# Altium PCB My_L431_14.PcbDoc
Units mil, origin at the board's own origin, x right, y up, seen from the top; angles counter-clockwise.
Board outline 3350 x 3850 mil, 2 copper layers (Top Layer, Bottom Layer); 27 components, 75 nets, 254 pads, 95 vias.
Unrouted connection lines stored in the file: 2.
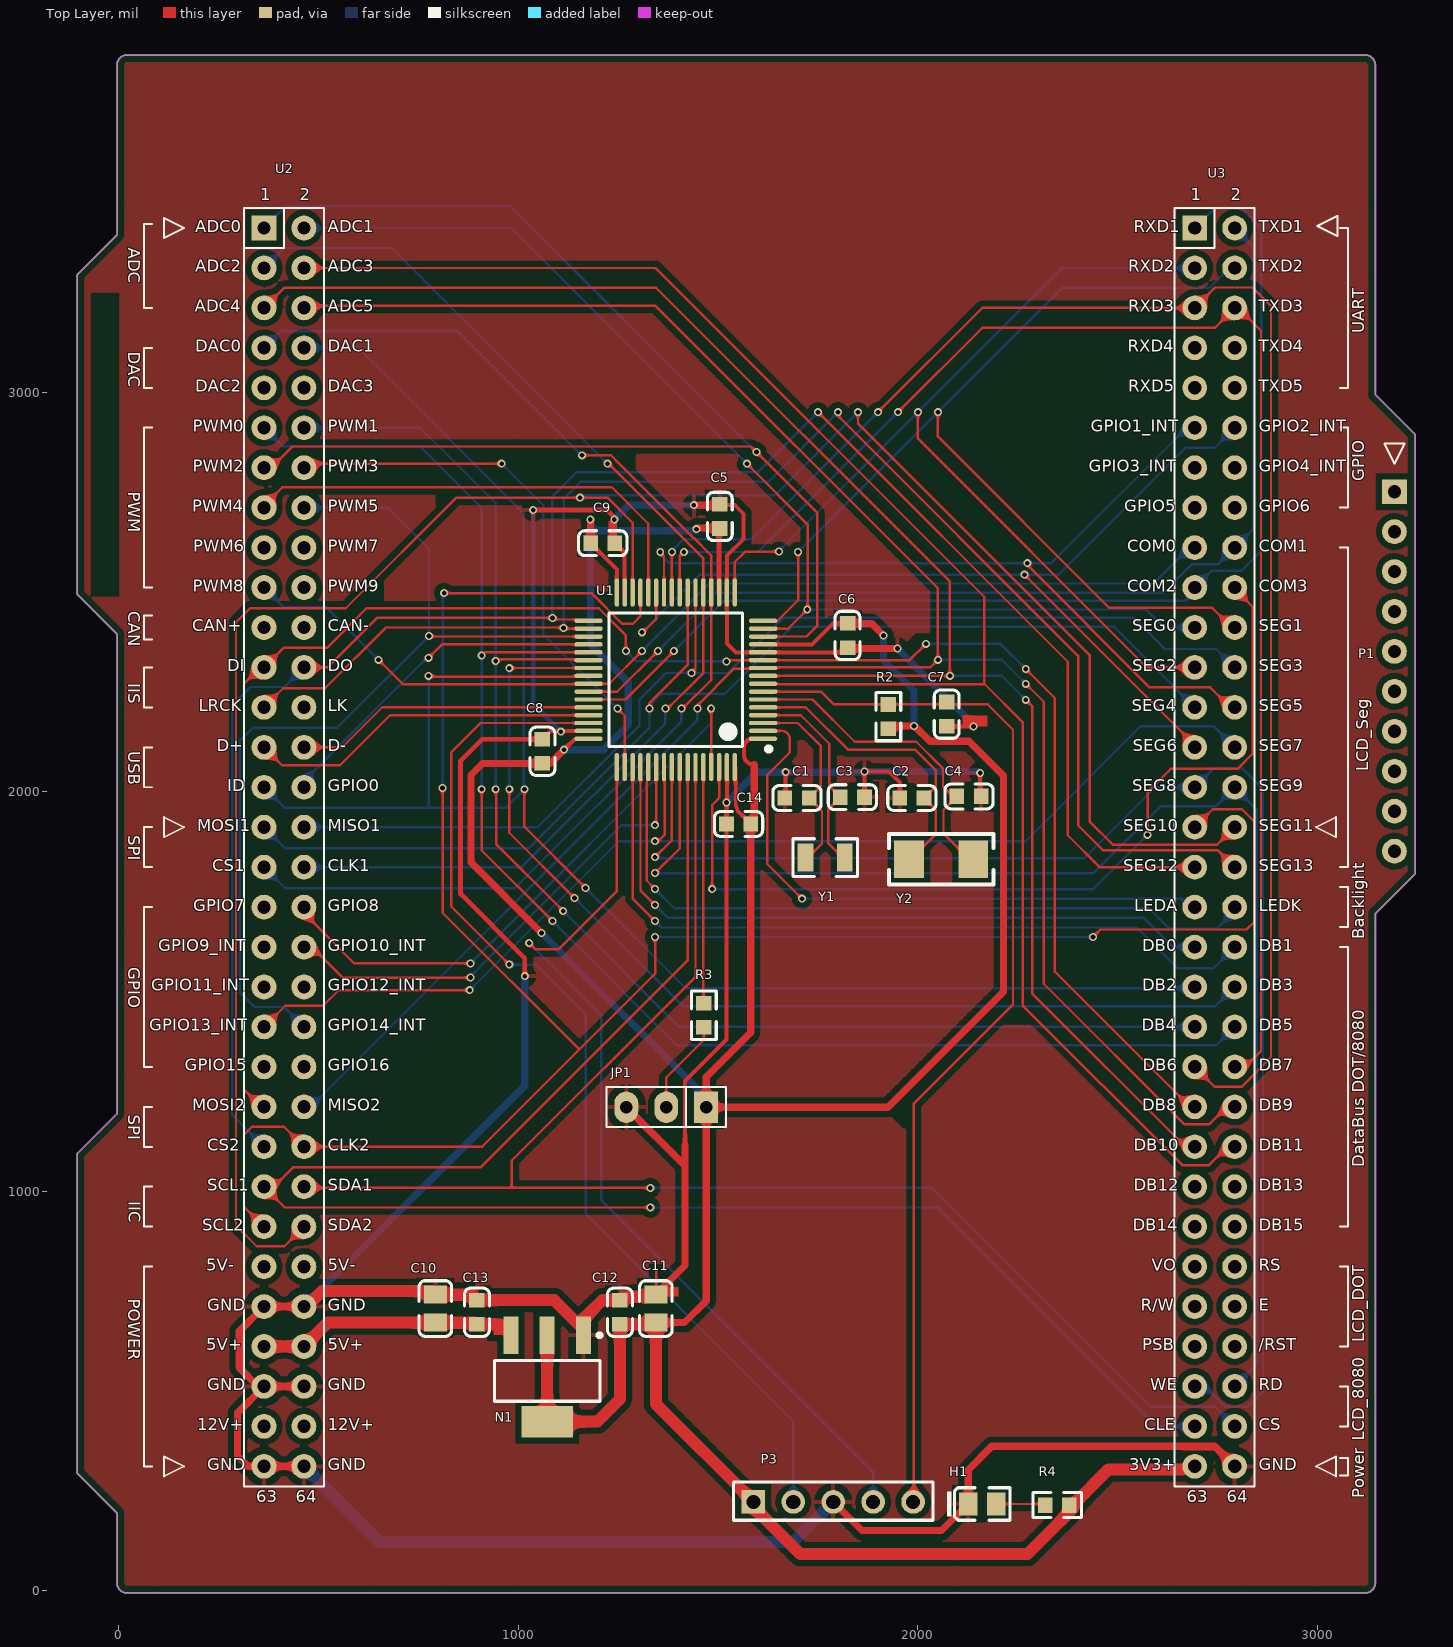
[diagram p0: Top Layer view]
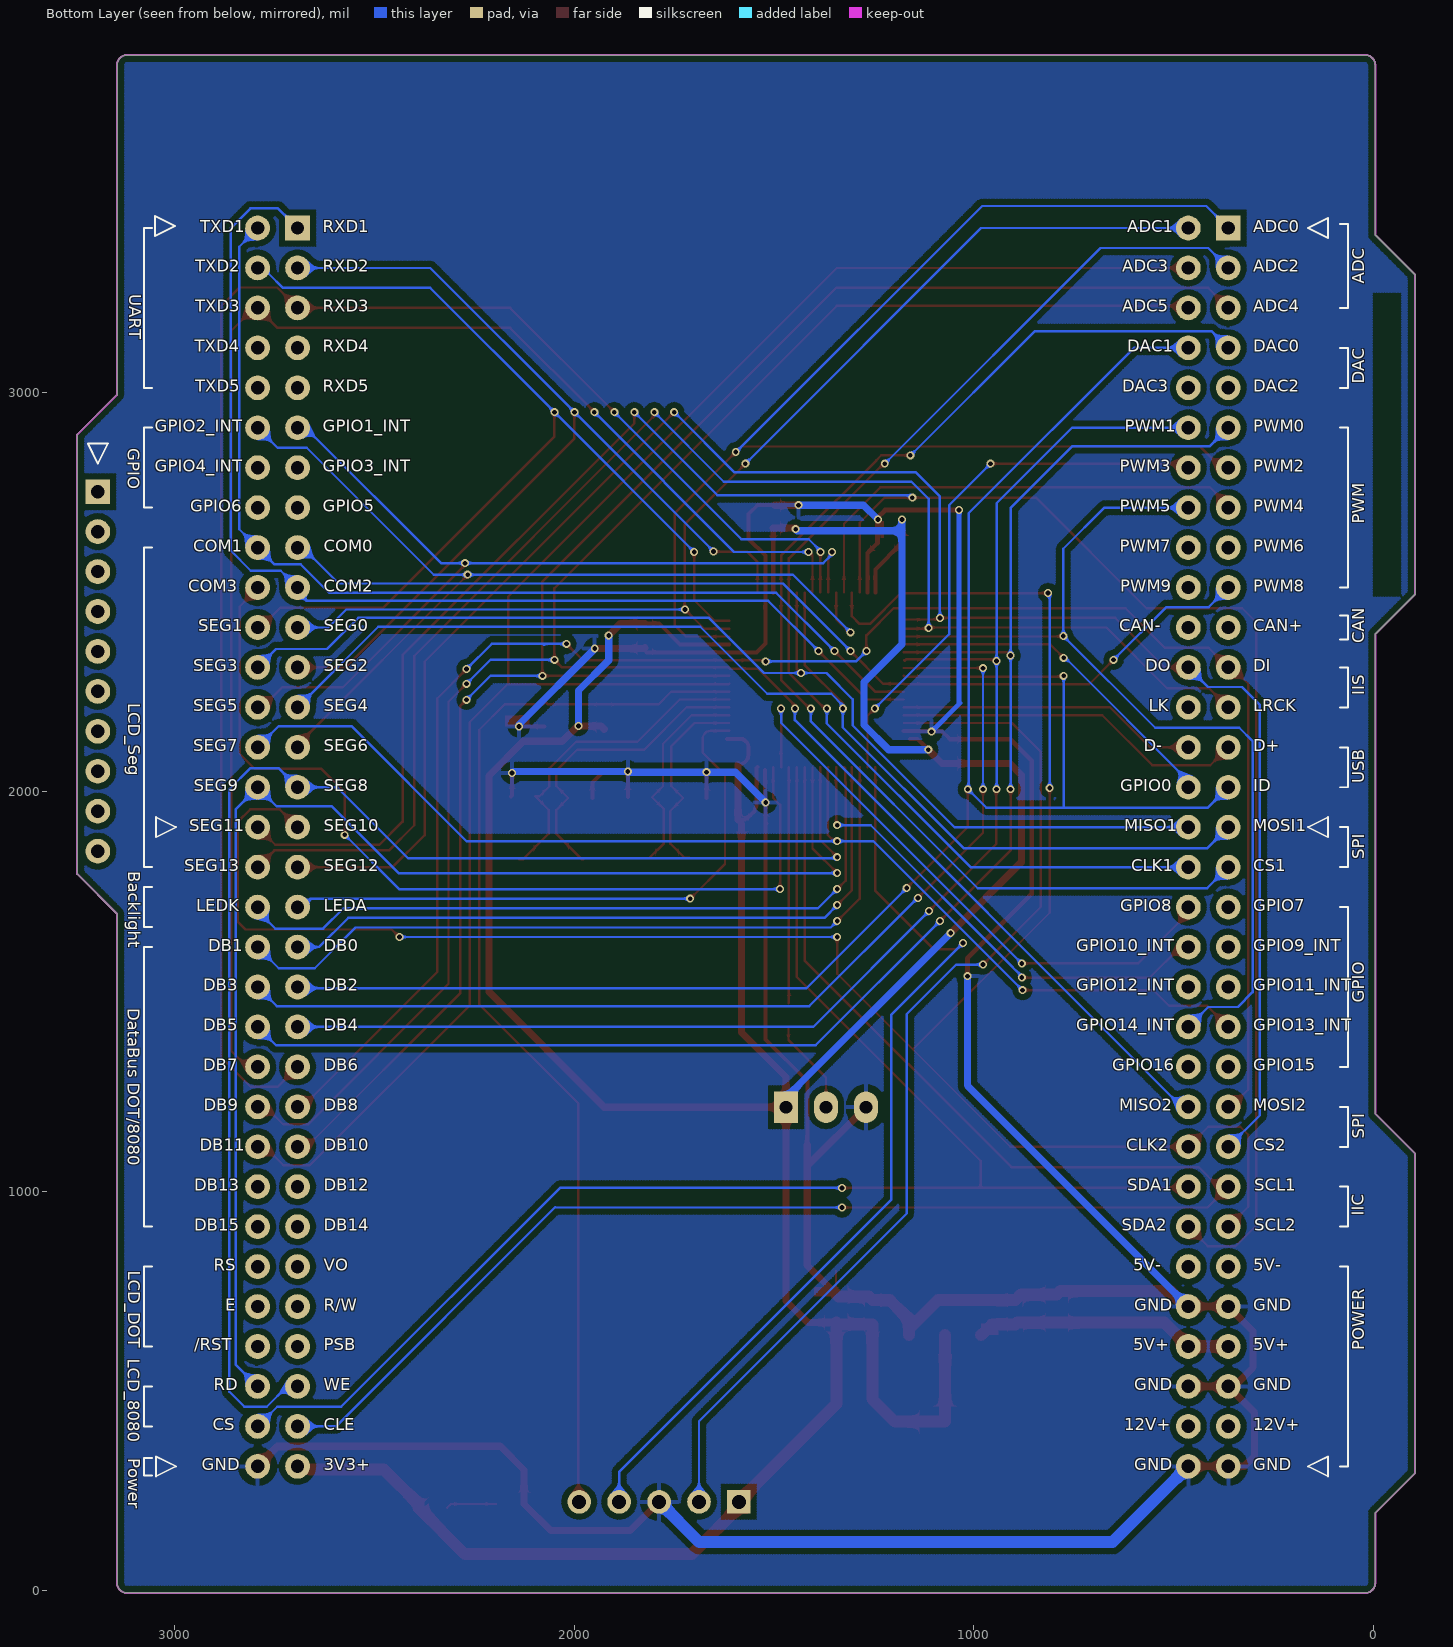
[diagram p1: Bottom Layer view, seen from below]
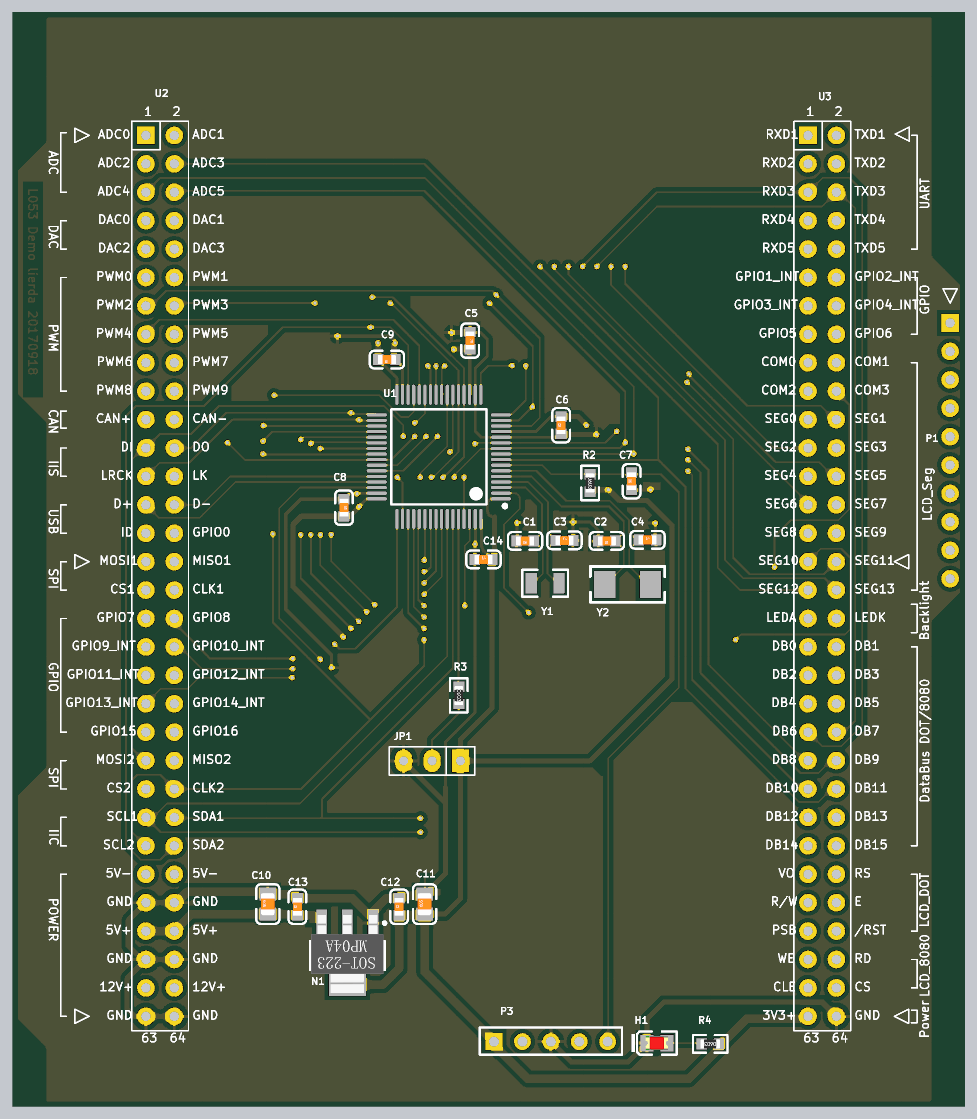
[diagram p2: 3D render of the assembled board from above, using the file's embedded part models]

## Layer stack, top to bottom
Top Solder: solder mask 0.4, Solder Resist, Dk 3.5
Top Layer: signal copper 1.4
Dielectric 1: dielectric 12.6, FR-4, Dk 4.8
Bottom Layer: signal copper 1.4
Bottom Solder: solder mask 0.4, Solder Resist, Dk 3.5

## Board outline
-5,19 -5,194 -105,294 -105,1094 -5,1194 -5,2394 -105,2494 -105,3294 -5,3394 -5,3819 cw(c20,3819) 20,3844 3120,3844 cw(c3120,3819) 3145,3819 3145,2994 3245,2894 3245,1794 3145,1694 3145,19 cw(c3120,19) 3120,-6 20,-6 cw(c20,19)

## Design rules (kind name [scope] priority, off if disabled: settings)
Clearance [All] p1: gap=15
PolygonConnect [All] p1: connectstyle=Relief reliefconductorwidth=10 reliefentries=4 polygonreliefangle="90 Angle" airgapwidth=18
RoutingTopology [All] p1: topology=Starburst
RoutingVias [All] p1: holewidth=12 width=20 viastyle="Through Hole" minholewidth=12 minwidth=20 maxholewidth=12 maxwidth=20
SilkToSilkClearance [All] p1: silktosilkclearance=2
SolderMaskExpansion [All] p1: expansion=2.5
Width POWER [InNetClass('Power')] p1: maxlimit=60 minlimit=8 preferedwidth=18
Width [All] p2: maxlimit=6 minlimit=6 preferedwidth=6
28 further rules are at their usual default settings.

## Classes and differential pairs
component class L431_BNRG: C1 C2 C3 C4 C5 C6 C7 C10 C11 C12 C13 C14 H1 JP1 N1 P1 P3 R2 R3 R4 U3 Y1 Y2
net class Power: GND VCC-3.3V VCC_5V+ VCC_5V- VCC_12V
net class GPIO: GPIO_PB0 GPIO_PB1 GPIO_PB2 GPIO_PB3 GPIO_PB8 GPIO_PB14 GPIO_PB15 GPIO_PD2

## Components (designator, comment, footprint, x,y, rotation, side; value= is the part's Value field where it differs from the comment)
C1 "12pF (120) 5% 50V" 0603_C 1697.31,1984 r180 top
C2 "20pF (200) 5% 50V" 0603_C 1985,1984 r180 top
C3 "12pF (120) 5% 50V" 0603_C 1836,1986 r0 top
C4 "20pF (200) 5% 50V" 0603_C 2128,1988 r0 top
C5 "100nF (104) 10% 50V" 0603_C 1504,2689 r270 top
C6 "100nF (104) 10% 50V" 0603_C 1824,2391 r90 top
C7 "100nF (104) 10% 50V" 0603_C 2072,2194 r90 top
C8 "100nF (104) 10% 50V" 0603_C 1060,2101 r270 top
C9 "100nF (104) 10% 50V" 0603_C 1211,2622 r180 top
C10 "100uF" 0805_C 792,706 r90 top
C11 "100uF" 0805_C 1344,706 r90 top
C12 "100nF" 0603_C 1254,696.75 r90 top
C13 "100nF" 0603_C 896,696.75 r90 top
C14 "100nF (104) 10% 50V" 0603_C 1551,1919 r0 top
H1 "发光二极管" 0805_LED_S1 2161,216.75 r0 top
JP1 "JX3" SIP3 1470,1210 r180 top
N1 "AMS1117-3.3V" SOT-223 1072,525 r270 top
P1 "DIP10-2.54" DIP10-2.54 3193,2751 r0 top
P3 "SWD" HDR1X5 1588,222 r0 top
R2 "10K" 0603_R 1926,2188 r270 top
R3 "10K" 0603_R 1464,1440.32 r270 top
R4 "1K" 0603_R 2349,214 r180 top
U1 "STM32L053R8T6" LQFP-64_10x10x05P 1394,2280 r90 top
U2 "DIP32x2-2.54-L" DIP32x2-2.54-L 363,3411 r0 top
U3 "DIP32x2-2.54-R" DIP32x2-2.54-R 2693,3411 r0 top
Y1 "32.768KHz ±20ppm 12.5pF" "SMD-3215_2P FC - 135" 1768,1835 r180 top
Y2 "8MHz ±20ppm 20pF" SMD-5032_2P 2058,1831 r180 top

## Footprints (in the part's own frame and the unit in brackets; to place one, negate y for a bottom-side part, rotate by r counter-clockwise, add the part's x,y. Pads: shape width x height; smd on the part's side, far side on the other; paste and mask are expansions set on the pad)
0603_C [mm]
  rect 0.93x0.98 smd: 1(-0.77,0) 2(0.77,0)
  silkscreen extent -1.53,-0.79 1.54,0.79, body extent -0.8,-0.4 0.8,0.4, height 0.3
0603_R [mm]
  rect 0.93x0.98 smd: 1(-0.77,0) 2(0.77,0)
  silkscreen extent -1.53,-0.79 1.54,0.79, body extent -0.85,-0.4 0.85,0.4, height 0.56
0805_C [mm]
  rect 1.16x1.47 smd: 1(-0.89,0) 2(0.89,0)
  silkscreen extent -1.77,-1.04 1.77,1.04, body extent -1,-0.62 1,0.63, height 0.77
0805_LED_S1 [mm]
  rect 1.16x1.47 smd: A(0.89,0) K(-0.89,0)
  silkscreen extent -2.24,-1.04 1.77,1.03, body extent -1.01,-0.62 1.01,0.62, height 1.1
DIP10-2.54 [mm] "双排直插针，2.54间距，加长针"
  rect 1.575x1.575 hole 0.85: 1(0,0)
  round 1.575 hole 0.85: 2(0,-2.54) 3(0,-5.08) 4(0,-7.62) 5(0,-10.16) 6(0,-12.7) 7(0,-15.24) 8(0,-17.78) 9(0,-20.32) 10(0,-22.86)
  silkscreen extent -0.64,1.78 0.64,3.05
DIP32x2-2.54-L [mm] "双排直插针，2.54间距，加长针"
  rect 1.575x1.575 hole 0.85: 1(0,0)
  round 1.575 hole 0.85: 2(2.54,0) 3(0,-2.54) 4(2.54,-2.54) 5(0,-5.08) 6(2.54,-5.08) 7(0,-7.62) 8(2.54,-7.62) 9(0,-10.16) 10(2.54,-10.16) 11(0,-12.7) 12(2.54,-12.7) 13(0,-15.24) 14(2.54,-15.24) 15(0,-17.78) 16(2.54,-17.78) 17(0,-20.32) 18(2.54,-20.32) 19(0,-22.86) 20(2.54,-22.86) 21(0,-25.4) 22(2.54,-25.4) 23(0,-27.94) 24(2.54,-27.94) 25(0,-30.48) 26(2.54,-30.48) 27(0,-33.02) 28(2.54,-33.02) 29(0,-35.56) 30(2.54,-35.56) 31(0,-38.1) 32(2.54,-38.1) 33(0,-40.64) 34(2.54,-40.64) 35(0,-43.18) 36(2.54,-43.18) 37(0,-45.72) 38(2.54,-45.72) 39(0,-48.26) 40(2.54,-48.26) 41(0,-50.8) 42(2.54,-50.8) 43(0,-53.34) 44(2.54,-53.34) 45(0,-55.88) 46(2.54,-55.88) 47(0,-58.42) 48(2.54,-58.42) 49(0,-60.96) 50(2.54,-60.96) 51(0,-63.5) 52(2.54,-63.5) 53(0,-66.04) 54(2.54,-66.04) 55(0,-68.58) 56(2.54,-68.58) 57(0,-71.12) 58(2.54,-71.12) 59(0,-73.66) 60(2.54,-73.66) 61(0,-76.2) 62(2.54,-76.2) 63(0,-78.74) 64(2.54,-78.74)
  silkscreen extent -7.62,-80.01 3.81,1.27
DIP32x2-2.54-R [mm] "双排直插针，2.54间距，加长针"
  rect 1.575x1.575 hole 0.85: 1(0,0)
  round 1.575 hole 0.85: 2(2.54,0) 3(0,-2.54) 4(2.54,-2.54) 5(0,-5.08) 6(2.54,-5.08) 7(0,-7.62) 8(2.54,-7.62) 9(0,-10.16) 10(2.54,-10.16) 11(0,-12.7) 12(2.54,-12.7) 13(0,-15.24) 14(2.54,-15.24) 15(0,-17.78) 16(2.54,-17.78) 17(0,-20.32) 18(2.54,-20.32) 19(0,-22.86) 20(2.54,-22.86) 21(0,-25.4) 22(2.54,-25.4) 23(0,-27.94) 24(2.54,-27.94) 25(0,-30.48) 26(2.54,-30.48) 27(0,-33.02) 28(2.54,-33.02) 29(0,-35.56) 30(2.54,-35.56) 31(0,-38.1) 32(2.54,-38.1) 33(0,-40.64) 34(2.54,-40.64) 35(0,-43.18) 36(2.54,-43.18) 37(0,-45.72) 38(2.54,-45.72) 39(0,-48.26) 40(2.54,-48.26) 41(0,-50.8) 42(2.54,-50.8) 43(0,-53.34) 44(2.54,-53.34) 45(0,-55.88) 46(2.54,-55.88) 47(0,-58.42) 48(2.54,-58.42) 49(0,-60.96) 50(2.54,-60.96) 51(0,-63.5) 52(2.54,-63.5) 53(0,-66.04) 54(2.54,-66.04) 55(0,-68.58) 56(2.54,-68.58) 57(0,-71.12) 58(2.54,-71.12) 59(0,-73.66) 60(2.54,-73.66) 61(0,-76.2) 62(2.54,-76.2) 63(0,-78.74) 64(2.54,-78.74)
  silkscreen extent -1.27,-80.01 9.75,1.27
HDR1X5 [mm]
  rect 1.5x1.5 hole 0.9: 1(0,0)
  round 1.5 hole 0.9: 2(2.54,0) 3(5.08,0) 4(7.62,0) 5(10.16,0)
  silkscreen extent -1.27,-1.17 11.43,1.27
LQFP-64_10x10x05P [mm]
  oval 0.28x1.8 smd mask+0.051: 1(-3.75,-5.55) 2(-3.25,-5.55) 3(-2.75,-5.55) 4(-2.25,-5.55) 5(-1.75,-5.55) 6(-1.25,-5.55) 7(-0.75,-5.55) 8(-0.25,-5.55) 9(0.25,-5.55) 10(0.75,-5.55) 11(1.25,-5.55) 12(1.75,-5.55) 13(2.25,-5.55) 14(2.75,-5.55) 15(3.25,-5.55) 16(3.75,-5.55) 33(3.75,5.55) 34(3.25,5.55) 35(2.75,5.55) 36(2.25,5.55) 37(1.75,5.55) 38(1.25,5.55) 39(0.75,5.55) 40(0.25,5.55) 41(-0.25,5.55) 42(-0.75,5.55) 43(-1.25,5.55) 44(-1.75,5.55) 45(-2.25,5.55) 46(-2.75,5.55) 47(-3.25,5.55) 48(-3.75,5.55)
  oval 1.8x0.28 smd mask+0.051: 17(5.55,-3.75) 18(5.55,-3.25) 19(5.55,-2.75) 20(5.55,-2.25) 21(5.55,-1.75) 22(5.55,-1.25) 23(5.55,-0.75) 24(5.55,-0.25) 25(5.55,0.25) 26(5.55,0.75) 27(5.55,1.25) 28(5.55,1.75) 29(5.55,2.25) 30(5.55,2.75) 31(5.55,3.25) 32(5.55,3.75) 49(-5.55,3.75) 50(-5.55,3.25) 51(-5.55,2.75) 52(-5.55,2.25) 53(-5.55,1.75) 54(-5.55,1.25) 55(-5.55,0.75) 56(-5.55,0.25) 57(-5.55,-0.25) 58(-5.55,-0.75) 59(-5.55,-1.25) 60(-5.55,-1.75) 61(-5.55,-2.25) 62(-5.55,-2.75) 63(-5.55,-3.25) 64(-5.55,-3.75)
  silkscreen extent -4.55,-6.05 4.25,4.25
SIP3 [mil]
  rect 60x78.74 hole 32: 1(0,0)
  oval 60x78.74 hole 32: 2(100,0) 3(200,0)
  silkscreen extent -50,-50 250,50
"SMD-3215_2P FC - 135" [mm]
  rect 1x1.8 smd: 1(-1.25,0) 2(1.25,0)
  silkscreen extent -2.05,-1.2 2.05,1.2
SMD-5032_2P [mm]
  rect 1.9x2.4 smd: 1(-2.05,0) 2(2.05,0)
  silkscreen extent -3.32,-1.6 3.32,1.6
SOT-223 [mm] "SOT223, 4-Leads, Body 6.7x7.3mm (max), Pitch 2.30mm, IPC Medium Density"
  rect 2.4x0.95 smd: 1(-2.9,2.3) 2(-2.9,0) 3(-2.9,-2.3)
  rect 2x3.3 smd: 2(2.6,0)
  silkscreen extent -3.02,-3.35 1.3,3.45, body extent -3.63,-3.25 3.33,3.25, height 1.7

## Part data
C1 C3: library part "0603 12pF (1", "贴片电容"
C2 C4: library part "0603 20pF (2", "贴片电容"
C5 C6 C7 C8 C9 C14: library part "0603 100nF (104)", "贴片电容"
C10 C11: library part 极性电容器
C12 C13: library part 普通贴片电容, "Capacitor"
JP1: "Connector"
P3: library part "Header 5", "Header, 5-Pin"
R2 R3 R4: library part 普通贴片电阻
U1: library part STM32F103RET6, "ARM"
Y1: library part SM, "贴片晶振"
Y2: library part "SMD-5032_2P 8MHz 20ppm 2", "贴片晶振"

## Via types
v1: diameter 20, hole 12, Top Layer to Bottom Layer, 95 vias

## Nets (pads, with @x,y where several pads share a name; then routed paths per layer and width w, separated by ;. In a path a pad name is that pad's centre, name@x,y a point inside that pad or via, vN(x,y) a via of type N, cw(c..) or ccw(c..) an arc to the next point about the centre after c; other vN are vias at no path point)
ADC0: U1.14 U2.1 U2.13 | length 3416.3
  Top Layer w6: U2.13 381,2811 434,2864 1582,2864 v1(1596,2850) 1748.46,2697.54 1748.46,2416 1720.73,2388.27 U1.14
  Bottom Layer w6: U2.1 418,3466 979,3466 1595,2850 v1(1596,2850)
ADC1: U1.15 U2.2 U3.21 | length 2900.8
  Top Layer w6: v1(1572,2821) 1724,2669 1724,2457 v1(1723,2456) 1674.95,2407.95 U1.15
  Bottom Layer w6: U2.2 982,3411 v1(1572,2821) ; v1(1723,2456) 2571,2456 2616,2411 U3.21
ADC2: U1.21 U2.3 U2.34 | length 2951.3
  Top Layer w6: v1@1224.35,2822.35 1462.9,2583.8 U1.21 1462.9,2297.2 1373.7,2208 v1(1368,2208)
  Bottom Layer w6: U2.3 413,3361 683,3361 v1(1223,2821) ; U2.34 1008,1811 1368,2171 v1(1368,2208)
ADC3: U1.8 U2.4 U3.48 | length 4377
  Top Layer w6: U2.4 1343,3311 2166,2488 2166,2270.16 ; U1.8 1613.82,2268.84 2164.69,2268.84 2166,2270.16 ; U3.48 2775,1111 2729,1065 2662,1065 2262,1465 2262,2174.16 2166,2270.16
ADC4: U1.9 U2.5 U3.47 | length 4268.3
  Top Layer w6: U2.5 413,3261 1345,3261 2080,2526 v1(2080,2290) 1612.66,2290 U1.9 ; v1(2270,2230) 2286,2214 2286,1495 2670,1111 U3.47
  Bottom Layer w6: v1(2080,2290) 2210,2290 v1(2270,2230)
ADC5: U1.10 U2.6 U2.46 U3.46 | length 5781.6
  Top Layer w6: U2.6 468,3216 1343,3216 2050,2509 v1(2050,2330) 2031,2311 1613.98,2311 U1.10 1610.98,2308 1540,2308 v1@1448,2216 ; v1(2270,2270) 2315,2225 2315,1519 2667,1167 2729,1167 2773,1211 U3.46
  Bottom Layer w6: U2.46 480,1211 1448,2179 v1(1448,2208) ; v1(2050,2330) 2210,2330 v1(2270,2270)
BOOT0: R3.1 U1.60 | length 591.3
  Top Layer w6: U1.60 1462.9,1471.73 R3.1
DAC1: U1.20 U2.7 U2.33 | length 3058
  Top Layer w6: v1(1159,2842) 1231.7,2842 1244,2829.7 1244,2829.3 1437.3,2636 1438,2636 1482.58,2591.42 U1.20 1482.58,2279.58 1411,2208 v1(1408,2208)
  Bottom Layer w6: U2.33 416,1758 990,1758 1408,2176 v1(1408,2208) ; U2.7 405,3153 847,3153 1158,2842 v1(1159,2842)
DAC2: U1.40 U2.8 U2.29 U3.39 | length 4799.2
  Top Layer w6: v1(775,2290) 777,2288 1173.65,2288 U1.40 ; v1(1015,2006) 1015,1912 v1(1168,1759)
  Bottom Layer w6: U2.29@386,2011 U2.29 414,1960 969,1960 v1(1015,2006) 1013,2008 1013,2697 599,3111 U2.8 ; 775,1962 v1(775,2290) ; v1(1168,1759) 1419,1508 2690,1508 U3.39
DB0: U1.52 U3.37 | length 1755.1
  Top Layer w6: U1.52 1305.42,1752.58 v1(1342,1716)
  Bottom Layer w6: v1(1342,1716) 1374,1684 2566,1684 2639,1611 U3.37
DB1: U1.51 U3.38 | length 1930.6
  Top Layer w6: U1.51 1285.73,1732.27 v1(1342,1676)
  Bottom Layer w6: v1(1342,1676) 1358,1660 2548,1660 2650,1558 2740,1558 U3.38
DB3: U1.39 U3.40 | length 2625.8
  Top Layer w6: v1(977,2006) 977,1897 v1(1140,1734) ; v1@978,2311 979.47,2309.53 U1.39
  Bottom Layer w6: v1(977,2006) v1(977,2309) ; v1(1140,1734) 1141,1734 1412,1463 2745,1463 U3.40
DB4: U1.38 U2.12 U3.41 | length 3590.7
  Top Layer w6: v1@943,2326 v1@946.21,2329.21 ; v1(943,2327) 947,2331 1169.28,2331 1173.28,2327 U1.38@1174.5,2329.21 ; v1@944,2006 944,1869 v1(1112,1701)
  Bottom Layer w6: U2.12 754,2911 943,2722 v1(943,2327) v1(943,2006) ; v1(1112,1701) 1402,1411 U3.41
DB5: U1.37 U2.11 U3.42 | length 3867.2
  Top Layer w6: v1@908,2011 v1(908,2006) 908,1853 v1(1085,1676) ; v1(908,2341) 915.9,2348.9 U1.37
  Bottom Layer w6: U2.11 409,2865 753,2865 908,2710 v1(908,2341) v1(908,2006) ; v1(1085,1676) 1396,1365 2747,1365 U3.42
DB6: U1.25 U3.5 U3.43 | length 4019.6
  Top Layer w6: U1.25 v1(1384.16,2600) v1@1384.16,2601.16 ; v1(1900,2950) 2161,3211 U3.5 2744,3262 2838,3262 2884,3216 2884,1335 2810,1261 2743,1261 U3.43
  Bottom Layer w6: v1@1384.16,2601.16 1384.16,2602.86 1413.3,2632 1582,2632 v1(1900,2950)
DB7: U1.24 U3.6 U3.44 | length 3717.5
  Top Layer w6: U1.24@1407.02,2501.68 U1.24 1403.84,2570.41 1403.84,2589.84 v1(1414,2600) ; v1(1950,2950) 2161,3161 2743,3161 U3.6 2802,3211 2859,3154 2859,1351 2819,1311 U3.44
  Bottom Layer w6: v1(1414,2600) 1600,2600 v1(1950,2950)
DB8: U1.11 U2.23 U2.45 U3.45 | length 4532
  Top Layer w6: U2.45 356,1211 313,1254 313,2270 354,2311 U2.23 412,2360 521,2360 620,2459 1201.2,2459 1269,2391.2 v1(1269,2352) ; v1(1521,2326) 1521,2320.79 1521.79,2320 1531,2329.21 U1.11 1979.21,2329.21 v1(2020,2370) ; v1(2270,2307) 2343,2234 2343,1549 2681,1211 U3.45
  Bottom Layer w6: v1(1269,2352) 1295,2326 v1(1521,2326) ; v1(2020,2370) 2074,2370 ; 2077,2367 2074,2370 ; v1(2270,2307) 2207,2370 2074,2370
DB12: U3.49
DB13: U3.50
DB14: U3.51
DB15: U3.52
DISPLAY0: P1.1
DISPLAY1: P1.2
DISPLAY2: P1.3
GND: C1.2 C2.2 C3.2 C4.2 C5.1 C6.1 C7.1 C8.1 C9.1 C10.2 C11.2 C12.2 C13.2 C14.1 H1.K JP1.3 N1.1 P3.3 U1.12 U1.18 U1.31 U1.47 U1.63 U2.55 U2.56 U2.59 U2.60 U2.63 U2.64 U3.64 | length 11542
  Top Layer w10: C8.1 1080.42,2151.73 1119.05,2151.73 ; 1119.05,2152.05 U1.47 ; C9.1 1266.05,2597.27 U1.31 ; C12.2 C12.2@1262.47,735.53 ; 1417,1115 1417,1276 1521,1380 C14.1@1521,1922.68 ; C5.1@1498.68,2717 1542,2717 1564,2695 1564,2633 1521.95,2590.95 U1.18 1521.95,2371.05 1544.1,2348.9 U1.12 C6.1@1819.79,2348.9 ; C14.1@1520,1918.32 C14.1 1519,1920.68 C14.1@1521,1922.68 ; v1(1521,1973) C14.1@1521,1922.68 ; v1@1522.27,1976.97 U1.63@1522.27,2054.5 ; C1.2@1669,1984 v1(1669,2048.68) ; C3.2 v1(1866.31,2050.68) 1927.31,2050.68 1954.69,2023.32 C2.2 ; C7.1@2074.27,2163.42 v1(2138.95,2163.42) ; v1(2156,2047) 2156,1990.32 C4.2
  Top Layer w12: v1(1016,1538) 1016,1583 855,1744 855,2077 909.32,2131.32 C8.1 ; v1@1034,2705 v1(1037,2705) 1222,2705 1241.32,2685.68 C9.1
  Top Layer w18: U2.64 U2.63 323,311 297,337 297,445 U2.59 ; U2.60 U2.59 ; U2.56 U2.55 301,649 301,558 348,511 U2.59 ; JP1.3 1415.5,1064.5 ; C11.2 1417,814.04 1417,1115 ; v1(1439,2717) C5.1@1498.68,2717 ; P3.3 1860,150 2059.21,150 H1.K 2125.96,301.96 2185,361 2666.63,361 ; C6.1@1824,2360 1826,2358 v1(1949,2358)
  Top Layer w20: 2666.63,361 2743,361 U3.64
  Top Layer w30: U2.56 470,711 509,750 783.04,750 C10.2 882.02,741.04 C13.2 1089.94,727.06 N1.1@1162.55,654.45 ; N1.1 N1.1@1162.55,654.45 ; C12.2 1210.06,727.06 1162.55,679.55 N1.1@1162.55,654.45 ; C12.2@1262.47,735.53 1338.49,735.53 C11.2
  Bottom Layer w12: 1034,2222 v1(1106,2150) ; 1037,2222 v1(1037,2705)
  Bottom Layer w18: U2.56 1016,1264 v1(1016,1538) ; v1(1240,2681) 1276,2717 v1(1439,2717) ; v1(1521,1973) 1596.69,2048.68 v1(1669,2048.68) 1864.31,2048.68 v1(1866.31,2050.68) 2152.31,2050.68 v1(2156,2047) ; v1(1949,2358) 2138.95,2168.05 v1(2138.95,2163.42)
  Bottom Layer w30: U2.64 653,121 1687,121 P3.3
GPIO_PB0: U1.26 U3.11 U3.26 | length 2279.9
  Top Layer w6: v1@1352.5,2599.5 1364.47,2587.53 U1.26 ; v1@2267,2572 v1(2274,2572) 2274,2567 2580,2261 2732,2261 2782,2211 U3.26
  Bottom Layer w6: v1@1355,2602 v1(1355,2600) 1355,2594 1377,2572 v1(2274,2572) 2334,2572 2673,2911 U3.11
GPIO_PB1: U1.27 U3.12 U3.27 | length 2417.6
  Top Layer w6: v1@1312,2399 1344.79,2431.79 U1.27 ; v1(2267,2543) 2693,2117 U3.27
  Bottom Layer w6: v1(1309,2399) 1453,2543 v1(2267,2543) 2352,2543 2670,2861 2743,2861 U3.12
GPIO_PB2: U1.28 U2.15 | length 1196.2
  Top Layer w6: U2.15 363,2716 409,2762 1233.8,2762 1325.1,2670.7 U1.28
GPIO_PB3: U1.55 U2.41 U3.28 | length 2964.4
  Top Layer w6: U2.41 416,1464 511,1464 550,1503 v1(878,1503) ; v1(1342,1876) 1350,1876 1365.79,1891.79 1365.79,2060.18 U1.55
  Bottom Layer w6: v1(878,1503) 878.2,1503 1251.2,1876 v1(1342,1876) 2270,1876 2558,2164 2740,2164 U3.28
GPIO_PB8: U1.61 U2.36 | length 1531.7
  Top Layer w6: U2.36 463,1696 589,1570 v1(880,1570) ; U1.61 v1(1482.58,2208) v1@1482.58,2216
  Bottom Layer w6: v1(880,1570) 1482.58,2172.58 v1(1482.58,2208) ; v1@1480,2208 v1@1480,2213.42
GPIO_PB14: U1.35 U2.16 U2.42 | length 2375.6
  Top Layer w6: v1@783,2390 784.73,2388.27 U1.35
  Bottom Layer w6: U2.42 413,1461 339,1461 302,1498 302,2126.57 335.43,2160 546,2160 v1(776,2390) 776,2608 673,2711 U2.16
GPIO_PB15: U1.36 U2.30 | length 870
  Top Layer w6: v1(775,2335) 808.58,2368.58 U1.36
  Bottom Layer w6: U2.30 463,2027 771,2335 v1(775,2335)
GPIO_PD2: U1.54 U2.38 | length 1219.2
  Top Layer w6: U2.38 483,1611 559.5,1534.5 v1(880,1534.5) ; v1(1342,1916) 1344.79,1918.79 U1.54
  Bottom Layer w6: v1@876.5,1534.5 889,1547 889.53,1547 903,1560.47 903,1561 1258,1916 v1(1342,1916)
I2C1_SCL: U1.58 U2.49 U3.61 | length 4358.5
  Top Layer w6: v1(1330,959) 415,959 U2.49 388,1011 437,1060 906,1060 1423.53,1577.53 U1.58
  Bottom Layer w6: v1(1330,959) 2047,959 2048,960 2597,411 U3.61
I2C1_SDA: U1.59 U2.50 U3.62 | length 3817.7
  Top Layer w6: U2.50 466,1008 983,1008 ; v1(1330,1008) 983,1008 ; U1.59 1443.21,1536.21 983,1076 983,1008
  Bottom Layer w6: v1@1335,1008 2036,1008 2584,460 2744,460 U3.62
I2C2_SCL: U1.29 U2.48 U2.51 U3.31 | length 5402.3
  Top Layer w6: U2.51 313,961 313,1141 333,1161 413,1161 U2.48 909,1111 1342,1544 v1(1342,1636) ; v1(810,2009) 810,1697 1151.5,1355.5 ; v1(814,2497) 1183,2497 1260,2420 1286,2420 1305.42,2439.42 U1.29 ; v1(2438,1636) 2457,1655 2823,1655 2842,1674 2842,1925 2811,1956 2738,1956 U3.31
  Bottom Layer w6: v1(810,2009) 810,2493 v1(814,2497) ; v1(1342,1636) v1(2438,1636)
I2C2_SDA: U1.30 U2.52 U3.32 | length 5502.7
  Top Layer w6: U2.52 414,862 345,862 293,914 293,2424 328,2459 567.57,2459 844.57,2736 v1(1154,2736) 1223,2736 1285.73,2673.27 U1.30 ; v1(1850,2950) 1850,2922 2430,2342 2430,1925 2488,1867 2512,1867 2669.8,1867 2716.2,1867 2749,1867 U3.32 U3.32@2793,1914
  Bottom Layer w6: v1(1154,2736) 1160,2742 1642,2742 v1(1850,2950)
IIS_CK: U1.34 U2.25 U3.34 | length 3709.6
  Top Layer w6: U2.25 411,2259 516,2259 668,2411 v1@1113,2411 ; v1@1116.05,2407.95 U1.34 ; v1(1800,2950) 1800,2941 2401,2340 2401,1916 2464,1853 2506.2,1853 2675.6,1853 2710.4,1853 2751,1853 U3.34
  Bottom Layer w6: v1@1113,2411 1113,2733 1156,2776 1626,2776 v1(1800,2950)
  other v1: 1113,2410
IIS_LK: U2.26
IIS_WS: U1.33 U2.24 U2.47 U3.33 | length 4870.4
  Top Layer w6: U2.24 522,2311 646,2435 v1(1085,2435) ; v1@1085,2431 U1.33@1171.13,2431 ; v1(1750,2950) 2375,2325 2375,1891 2455,1811 U3.33 2693,1820 U3.33@2679,1834
  Bottom Layer w6: U2.47 284,1190 284,2217 329,2262 414,2262 U2.24 ; v1(1085,2435) 1085,2738.97 1146.03,2800 1600,2800 v1(1750,2950)
INTERFACE: P1.4
LCD_COM0: U1.41 U2.19 U3.17 | length 2571.9
  Top Layer w6: v1(650,2330) 711,2269 1174.34,2269 U1.41 1227.16,2270.16 v1(1309,2352)
  Bottom Layer w6: U2.19 412,2462 518,2462 v1(650,2330) ; v1(1309,2352) 1478,2521 2590,2521 2680,2611 U3.17
LCD_COM1: U1.42 U3.2 U3.18 | length 2604.9
  Top Layer w6: U1.42 1247.47,2250.47 v1(1349,2352)
  Bottom Layer w6: v1(1349,2352) 1495,2498 2614,2498 2685,2569 2751,2569 U3.18 2839,2657 2839,3364 2793,3410 U3.2
LCD_COM2: U1.43 U3.1 U3.19 | length 2860.2
  Top Layer w6: U1.43 1267.79,2230.79 v1(1389,2352)
  Bottom Layer w6: v1(1389,2352) 1515,2478 2670,2478 2693.03,2501.03 U3.19 ; U3.19 2735,2553 2810,2553 2860,2603 2860,3411 2811,3460 2742,3460 U3.1
LCD_COM3: U1.62 U3.20 | length 2303.4
  Top Layer w6: v1(1485,1756) 1485,1966.7 1502.27,1983.97 U1.62 ; v1(2575,1892) 2575,1999 2633,2057 2800,2057 2838,2095 2838,2463 2793,2508 U3.20
  Bottom Layer w6: v1(1485,1756) 2439,1756 v1(2575,1892)
LCD_RD: U1.57 U3.30 U3.60 | length 3376.7
  Top Layer w6: v1(1342,1796) 1403.84,1857.84 U1.57
  Bottom Layer w6: v1(1342,1796) 2440,1796 2607,1963 2745,1963 U3.30 2793,2010 2848,1955 2848,566 U3.60
LCD_SEG1: U1.16 U3.4 U3.22 | length 2627.8
  Top Layer w6: U1.16 1648.64,2427.64 1700,2479 v1(1700,2600) ; v1(2050,2950) 2050,2889 2479,2460 2737,2460 2786,2411 U3.22
  Bottom Layer w6: v1(1700,2600) v1(2050,2950) 2361,3261 2729.57,3261 2765,3296.43 2765,3311 U3.4
LCD_SEG2: U1.17 U3.3 U3.23 | length 2533
  Top Layer w6: U1.17 1541.64,2574.64 1568,2601 v1(1652,2601) v1@1658,2601 ; v1(2000,2950) 2000,2884 2573,2311 U3.23
  Bottom Layer w6: v1@1658,2601 1658,2608 v1(2000,2950) 2361,3311 U3.3
LCD_SEG3: U1.22 U2.32 U3.24 | length 2842.2
  Top Layer w6: v1(1433,2297) 1443.21,2307.21 U1.22
  Bottom Layer w6: U2.32 1048,1911 1303,2166 1303,2231 1369,2297 v1(1433,2297) 1525,2297 1663,2435 2541,2435 2619,2357 2747,2357 U3.24
LCD_SEG4: U1.23 U2.31 U3.25 | length 3021.1
  Top Layer w6: v1@1328,2214.7 1328,2221.7 1423.53,2317.23 U1.23
  Bottom Layer w6: U2.31 416,1858 1025,1858 1328,2161 v1(1328,2208) 1328,2216 1357,2245 1517,2245 1685,2413 2491,2413 U3.25
LCD_SEG8: U1.56 U3.29 U3.59 | length 3597.4
  Top Layer w6: v1(1342,1836) 1384.16,1878.16 U1.56
  Bottom Layer w6: v1(1342,1836) 1344.68,1833.32 2416.31,1833.32 2594,2011 U3.29 2741,2059 2811,2059 2864,2006 2864,497.99 2826.01,460 2770,460 2719,511 U3.59
LEDA: U1.2 U3.35 | length 1533.9
  Top Layer w6: U1.2 1659,2152.05 cw(c1659,2132.05) 1679,2132.05 1679,2098 1623,2042 1623,1819 v1(1710,1732)
  Bottom Layer w6: v1(1710,1732) 2660,1732 2687,1705 U3.35
LEDK: U1.53 U3.36 | length 1836.1
  Top Layer w6: U1.53 1321.93,2058.32 1321.93,2024.74 1321,2023.81 1321,1777 v1(1342,1756)
  Bottom Layer w6: v1(1342,1756) 1390,1708 2578,1708 2629,1657 2749,1657 2793,1701 U3.36
MEMORY: P1.8
NetH1_1: H1.A R4.2 | length 126.6
  Top Layer w6: H1.A 2309.04,216.75 R4.2@2318.68,207.1
NetJP1_2: JP1.2 R3.2 | length 221.9
  Top Layer w6: JP1.2@1370,1227 1370,1284 1464,1378 R3.2
NRST: C7.2 P3.5 R2.1 U1.7 | length 2705.7
  Top Layer w6: U1.7 1757.53,2250.47 1789.69,2218.31 R2.1 2066,2218.31 C7.2 2078,2218.31 2174.69,2218.31 2238,2155 2238,1467 1990,1219 P3.5@1990,222
OSC1: C1.1 U1.3 Y1.2 | length 499.7
  Top Layer w6: U1.3 1699.27,2171.73 1757,2114 1757,2013.37 C1.1 1760,1951.63 1760,1870 1725,1835 Y1.2 Y1.2@1712.79,1835
OSC2: C3.1 U1.4 Y1.1 | length 518.4
  Top Layer w6: U1.4 1706.58,2191.42 1778,2120 1778,2013.68 C3.1 1776,1956.32 1776,1870.21 Y1.1@1811.21,1835
OSC3: C2.1 U1.5 Y2.2 | length 775.4
  Top Layer w6: U1.5 1718.9,2211.1 1824.68,2105.32 1992.68,2105.32 2045,2053 2045,2013.68 C2.1 2045,1954.32 2045,1894 1982,1831 Y2.2
OSC4: C4.1 U1.6 Y2.1 | length 820.3
  Top Layer w6: U1.6 1736.21,2230.79 1842,2125 1996,2125 2062.84,2058.16 2062.84,2013.16 2088,1988 C4.1 2064,1954.32 2064,1895 2128,1831 Y2.1
PWM2: U1.50 U2.14 | length 1421.6
  Top Layer w6: U2.14@488,2806 481,2813 471,2803 U2.14 473,2821 v1(958,2821) ; v1(1248,2208) 1266.05,2189.95 U1.50
  Bottom Layer w6: v1(958,2821) 1062,2717 1062,2394 v1(1248,2208)
SENSOR0: P1.9
SENSOR1: P1.10
SWCLK: P3.4 U1.49 | length 2352.4
  Top Layer w6: v1(1027,1621) 1043,1605 1100,1605 1246.36,1751.36 U1.49
  Bottom Layer w6: v1(1027,1621) 1207,1441 1207,978 1888,297 P3.4
SWDIO: P3.2 U1.46 | length 2644.4
  Top Layer w6: v1(977,1567) 832,1712 832,2099 904.73,2171.73 U1.46
  Bottom Layer w6: v1(977,1567) 1044,1567 1168,1443 1168,944 1688,424 P3.2
USB_D+: U1.45 U2.27 | length 883.1
  Top Layer w6: U2.27 408,2066 553,2066 678.42,2191.42 U1.45
USB_D-: U1.44 U2.28 | length 754
  Top Layer w6: U2.28 559,2111 659.1,2211.1 U1.44
VCC-3.3V: C5.2 C6.2 C8.2 C9.2 C11.1 C12.1 C14.2 JP1.1 N1.2 P3.1 R2.2 R4.1 U1.1 U1.13 U1.19 U1.32 U1.48 U1.64 U3.63 | length 9507.3
  Top Layer w10: v1(1114,2105) 1141,2132 U1.48@1160,2132 ; C9.2 1246.36,2556.32 U1.32 ; U1.64 1544,2059.13 1544,1965.75 1550.45,1948.77 1573.36,1930.81 1581.99,1930.3 1589.81,1929.83 C14.2@1590.31,1929.43 ; U1.1@1583.36,2132.36 U1.1 U1.1@1617.5,2132.36 ; U1.1@1585,2132 ccw(c1585,2111.46) 1564.46,2111.46 1564.46,2092 ccw(c1588.31,2092) 1588.31,2068.15 ; U1.13 1735.13,2368.58 1787.54,2421 C6.2@1828,2421 ; 2662,303 2685,303 U3.63
  Top Layer w12: U1.19 C5.2@1502.27,2659.95
  Top Layer w15: C14.2 C14.2@1590.31,1929.43
  Top Layer w18: v1(1058,1646) 881,1823 881,2042 909.68,2070.68 C8.2 1079.68,2070.68 v1(1114,2105) ; C9.2 v1@1180.68,2675.32 ; C11.1@1339.47,666.43 C11.1 1415.96,670.96 1470,725 JP1.1 1470,1285.68 1581.31,1397 C14.2 ; v1(1446,2657) 1446,2659 1445.05,2659.95 C5.2@1502.27,2659.95 ; JP1.1@1484.32,1210 1925,1210 2214,1499 2214,2040 2128,2126 2030.28,2126 1992.28,2164 v1(1990,2164) 1933,2164 R2.2@1925,2156 ; P3.1@1581.5,229.5 1581.5,215.5 P3.1 ; C14.2@1590.31,1929.43 1590.31,2068 ; C6.2 1883.69,2421.32 v1(1914,2391)
  Top Layer w30: N1.2@1072,639.17 1072,422.64 1197.64,422.64 1254,479 C12.1 C11.1@1339.47,666.43 ; C11.1 1344,467 P3.1@1581.5,229.5 ; P3.1@1581.5,215.5 1706,91 2274,91 2390,207 2390,216 2477,303 2662,303
  Bottom Layer w18: v1(1058,1646) 1470,1234 JP1.1 ; v1(1114,2105) 1213,2105 1275,2167 1275,2274 1180,2369 1180,2653 ; v1(1180,2681) 1180,2653 ; v1(1446,2657) 1442,2653 1180,2653 ; v1(1914,2391) 1914,2329 1990,2253 v1(1990,2164)
VCC_5V+: C10.1 C13.1 N1.3 U2.57 U2.58 | length 656.5
  Top Layer w10: C13.1@891.47,670.96 C13.1
  Top Layer w30: U2.57 U2.58 522.96,670.96 C10.1 C13.1@891.47,670.96 ; C13.1 954.19,666.43 N1.3
VCC_5V-: U2.53 U2.54
VCC_12V: U2.61 U2.62
WIRELESS0: P1.5
WIRELESS1: P1.6
WIRELESS2: P1.7
pads on no net: U2.9 U2.10 U2.17 U2.18 U2.20 U2.21 U2.22 U2.35 U2.37 U2.39 U2.40 U2.43 U2.44 U3.7 U3.8 U3.9 U3.10 U3.13 U3.14 U3.15 U3.16 U3.53 U3.54 U3.55 U3.56 U3.57 U3.58

## Polygon pours and split planes (outlines as drawn)
GND on Bottom Layer "Top Layer-No Net" (hatched 90Degree grid 4 track 5, remove dead copper, pour order 0): -270,4038 -222,3990 3296,3990 3296,-166 3111,-351 2963,-203 -328,-203 -328,3852 -188,3992
GND on Top Layer "Top Layer-No Net" (hatched 90Degree grid 4 track 5, remove dead copper, pour order 6): 3537,-431 3389,-283 3389,4118 -584,4118 -781,4315 -612,4146 -612,-600

## Keep-outs
Keep-Out Layer:
  the board outline again, w5
  text "L053 Demo lierda 20170918" at -49.48,3228.62 h30 r270

## Other copper
Top Layer:
  rectangle net GND: 1342,751 1348,802
  rectangle net GND: 1338.49,735.53 1400.44,760
  rectangle net GND: 2138.95,2163.42 2174,2190.01
  rectangle net GND: 2111.79,2163.42 2138.95,2192
  rectangle net GND: 1234,2641.17 1241.32,2673
  rectangle net GND: 1225,2635 1234,2678
  rectangle net VCC_5V+: 938,639.17 981.45,669
  pour cut-out: 751,698 751,720 742,729 537,729 537,696 542,691
  pour cut-out: 1428,1160 1453.75,1160 1461,1152.75 1452,1143.75 1452,788 1431,788 1421,798 1435,812 1435,827
  pour cut-out: 1296,2855 1296,2797 1295,2796 1247,2844 1247,2849
  pour cut-out: 2058,2081 2058,2115 2051,2108 2036,2108
  pour cut-out: 1690,2152 1694,2148 1713,2148 1732,2129 1730,2127 1690,2127
  pour cut-out: 1794,2111 1797,2108 1810,2108 1825,2093 1820,2088 1789,2088
  pour cut-out: 2189,2088 2228,2088 2228,2067 2225,2064
  pour cut-out: 2196,1413 2197,1414 2297,1414 2297,1416 2250,1463
  pour cut-out: 1925,1192 1962,1155 1979,1155 1979,1233
  pour cut-out: 613,2468 664,2468 666,2466 666,2541 595,2470
  pour cut-out: 790,2753 791,2752 829,2752 829,2730 798,2699 791,2699
  pour cut-out: 1195,2503 1229,2503 1232,2500 1231,2499 1231,2477 1217,2477 1209,2485
  pour cut-out: 1220,2653 1220,2691 1215,2696 1199,2696 1199,2656 1202,2653
  pour cut-out: 2017.81,2206 2032.21,2191.61 2032.21,2157.21 2027,2152 2002,2177 1966,2177 1953,2190 1953,2200 1959,2206
  pour cut-out: 1966,2371 1993,2398 2037,2398 2037,2391 2031,2385 2012,2385 1979,2352 1977,2352 1977,2360

## Text inside footprints (layer, text, board x,y; h text height)
U2: Top Overlay "POWER" at 23,731 h30 r270; Top Overlay "SPI" at 23,1191 h30 r270; Top Overlay "SPI" at 23,1891 h30 r270; Top Overlay "GPIO" at 23,1561 h30 r270; Top Overlay "USB" at 23,2101 h30 r270; Top Overlay "IIS" at 23,2271 h30 r270; Top Overlay "CAN" at 23,2451 h30 r270; Top Overlay "PWM" at 23,2751 h30 r270; Top Overlay "DAC" at 23,3101 h30 r270; Top Overlay "ADC" at 23,3361 h30 r270; Top Overlay "DO" at 523,2301 h30; Top Overlay "CAN-" at 523,2401 h30; Top Overlay "PWM9" at 523,2501 h30; Top Overlay "PWM7" at 523,2601 h30; Top Overlay "PWM5" at 523,2701 h30; Top Overlay "PWM3" at 523,2801 h30; Top Overlay "PWM1" at 523,2901 h30; Top Overlay "DAC3" at 523,3001 h30; Top Overlay "DAC1" at 523,3101 h30; Top Overlay "ADC5" at 523,3201 h30; Top Overlay "ADC3" at 523,3301 h30; Top Overlay "ADC1" at 523,3401 h30; Top Overlay "LK" at 523,2201 h30; Top Overlay "D-" at 523,2101 h30; Top Overlay "GPIO0" at 523,2001 h30; Top Overlay "MISO1" at 523,1901 h30; Top Overlay "CLK1" at 523,1801 h30; Top Overlay "GPIO8" at 523,1701 h30; Top Overlay "GPIO10_INT" at 523,1601 h30; Top Overlay "GPIO12_INT" at 523,1501 h30; Top Overlay "GPIO14_INT" at 523,1401 h30; Top Overlay "GPIO16" at 523,1301 h30; Top Overlay "MISO2" at 523,1201 h30; Top Overlay "CLK2" at 523,1101 h30; Top Overlay "5V-" at 523,801 h30; Top Overlay "GND" at 523,701 h30; Top Overlay "5V+" at 523,601 h30; Top Overlay "12V+" at 523,401 h30; Top Overlay "GND" at 523,301 h30; Top Overlay "GND" at 220.58,301 h30; Top Overlay "12V+" at 196.02,401 h30; Top Overlay "GND" at 220.58,501 h30; Top Overlay "5V+" at 218.01,601 h30; Top Overlay "GND" at 220.58,701 h30; Top Overlay "5V-" at 218.01,801 h30; Top Overlay "CS2" at 220.58,1101 h30; Top Overlay "MOSI2" at 182.88,1201 h30; Top Overlay "GPIO15" at 164.02,1301 h30; Top Overlay "GPIO13_INT" at 76.04,1401 h30; Top Overlay "GPIO11_INT" at 80.76,1501 h30; Top Overlay "GPIO9_INT" at 98.04,1601 h30; Top Overlay "GPIO7" at 186.02,1701 h30; Top Overlay "CS1" at 233.44,1801 h30; Top Overlay "MOSI1" at 195.73,1901 h30; Top Overlay "ID" at 270.86,2001 h30; Top Overlay "D+" at 244.72,2101 h30; Top Overlay "LRCK" at 200.16,2201 h30; Top Overlay "1" at 353,3481 h30; Top Overlay "2" at 453,3481 h30; Top Overlay "64" at 443,221 h30; Top Overlay "63" at 343,221 h30; Top Overlay "ADC0" at 190.73,3401 h30; Top Overlay "ADC2" at 190.73,3301 h30; Top Overlay "ADC4" at 189.3,3201 h30; Top Overlay "DAC0" at 190.73,3101 h30; Top Overlay "DAC2" at 190.73,3001 h30; Top Overlay "PWM0" at 184.45,2901 h30; Top Overlay "PWM2" at 184.45,2801 h30; Top Overlay "PWM4" at 183.02,2701 h30; Top Overlay "PWM6" at 185.88,2601 h30; Top Overlay "PWM8" at 184.45,2501 h30; Top Overlay "CAN+" at 183.45,2401 h30; Top Overlay "DI" at 270.43,2301 h30; Top Overlay "SCL2" at 208.2,901 h30; Top Overlay "SCL1" at 221.05,1001 h30; Top Overlay "SDA1" at 523,1001 h30; Top Overlay "SDA2" at 523,901 h30; Top Overlay "IIC" at 24.42,973.99 h30 r270; Top Overlay "GND" at 523,501 h30; Bottom Overlay "GND" at 598.46,301 h30; Bottom Overlay "12V+" at 623.03,401 h30; Bottom Overlay "5V+" at 601.03,601 h30; Bottom Overlay "GND" at 598.46,701 h30; Bottom Overlay "5V-" at 601.03,801 h30; Bottom Overlay "CLK2" at 618.88,1101 h30; Bottom Overlay "MISO2" at 636.17,1201 h30; Bottom Overlay "GPIO16" at 653.59,1301 h30; Bottom Overlay "GPIO14_INT" at 743,1401 h30; Bottom Overlay "GPIO12_INT" at 743,1501 h30; Bottom Overlay "GPIO10_INT" at 743,1601 h30; Bottom Overlay "GPIO8" at 633.02,1701 h30; Bottom Overlay "CLK1" at 606.03,1801 h30; Bottom Overlay "MISO1" at 623.31,1901 h30; Bottom Overlay "GPIO0" at 633.02,2001 h30; Bottom Overlay "D-" at 574.32,2101 h30; Bottom Overlay "LK" at 562.32,2201 h30; Bottom Overlay "ADC1" at 615.46,3401 h30; Bottom Overlay "ADC3" at 628.31,3301 h30; Bottom Overlay "ADC5" at 628.31,3201 h30; Bottom Overlay "DAC1" at 615.46,3101 h30; Bottom Overlay "DAC3" at 628.31,3001 h30; Bottom Overlay "PWM1" at 621.74,2901 h30; Bottom Overlay "PWM3" at 634.59,2801 h30; Bottom Overlay "PWM5" at 634.59,2701 h30; Bottom Overlay "PWM7" at 634.59,2601 h30; Bottom Overlay "PWM9" at 633.17,2501 h30; Bottom Overlay "CAN-" at 635.59,2401 h30; Bottom Overlay "DO" at 571.47,2301 h30; Bottom Overlay "POWER" at 23,601 h30 r270; Bottom Overlay "SPI" at 23,1131 h30 r270; Bottom Overlay "SPI" at 23,1831 h30 r270; Bottom Overlay "GPIO" at 23,1471 h30 r270; Bottom Overlay "USB" at 23,2021 h30 r270; Bottom Overlay "IIS" at 23,2241 h30 r270; Bottom Overlay "CAN" at 23,2371 h30 r270; Bottom Overlay "PWM" at 23,2671 h30 r270; Bottom Overlay "DAC" at 23,3021 h30 r270; Bottom Overlay "ADC" at 23,3271 h30 r270; Bottom Overlay "DI" at 299.96,2301 h30; Bottom Overlay "CAN+" at 299.96,2401 h30; Bottom Overlay "PWM8" at 299.96,2501 h30; Bottom Overlay "PWM6" at 299.96,2601 h30; Bottom Overlay "PWM4" at 299.96,2701 h30; Bottom Overlay "PWM2" at 299.96,2801 h30; Bottom Overlay "PWM0" at 299.96,2901 h30; Bottom Overlay "DAC2" at 299.96,3001 h30; Bottom Overlay "DAC0" at 299.96,3101 h30; Bottom Overlay "ADC4" at 299.96,3201 h30; Bottom Overlay "ADC2" at 299.96,3301 h30; Bottom Overlay "ADC0" at 299.96,3401 h30; Bottom Overlay "LRCK" at 299.96,2201 h30; Bottom Overlay "D+" at 299.96,2101 h30; Bottom Overlay "ID" at 299.96,2001 h30; Bottom Overlay "MOSI1" at 299.96,1901 h30; Bottom Overlay "CS1" at 299.96,1801 h30; Bottom Overlay "GPIO7" at 299.96,1701 h30; Bottom Overlay "GPIO9_INT" at 299.96,1601 h30; Bottom Overlay "GPIO11_INT" at 299.96,1501 h30; Bottom Overlay "GPIO13_INT" at 299.96,1401 h30; Bottom Overlay "GPIO15" at 299.96,1301 h30; Bottom Overlay "MOSI2" at 299.96,1201 h30; Bottom Overlay "CS2" at 299.96,1101 h30; Bottom Overlay "5V-" at 299.96,801 h30; Bottom Overlay "GND" at 299.96,701 h30; Bottom Overlay "5V+" at 299.96,601 h30; Bottom Overlay "GND" at 299.96,501 h30; Bottom Overlay "12V+" at 299.96,401 h30; Bottom Overlay "GND" at 299.96,301 h30; Bottom Overlay "IIC" at 24.42,938.56 h30 r270; Bottom Overlay "SDA2" at 629.16,901 h30; Bottom Overlay "SDA1" at 616.3,1001 h30; Bottom Overlay "SCL1" at 297.93,1001 h30; Bottom Overlay "SCL2" at 297.93,901 h30; Bottom Overlay "GND" at 598.46,501 h30
U3: Top Overlay "Power" at 3117,230.92 h30 r90; Top Overlay "LCD_8080" at 3117.94,375.57 h30 r90; Top Overlay "LCD_DOT" at 3117,621 h30 r90; Top Overlay "DataBus DOT/8080" at 3117.94,1059.82 h30 r90; Top Overlay "Backlight" at 3117,1631 h30 r90; Top Overlay "LCD_Seg" at 3127,2051 h30 r90; Top Overlay "SEG5" at 2853,2201 h30; Top Overlay "SEG3" at 2853,2301 h30; Top Overlay "SEG1" at 2853,2401 h30; Top Overlay "COM3" at 2853,2501 h30; Top Overlay "COM1" at 2853,2601 h30; Top Overlay "SEG7" at 2853,2101 h30; Top Overlay "SEG9" at 2853,2001 h30; Top Overlay "SEG11" at 2853,1901 h30; Top Overlay "SEG13" at 2853,1801 h30; Top Overlay "LEDK" at 2853,1701 h30; Top Overlay "DB1" at 2853,1601 h30; Top Overlay "DB3" at 2853,1501 h30; Top Overlay "DB5" at 2853,1401 h30; Top Overlay "DB7" at 2853,1301 h30; Top Overlay "DB9" at 2853,1201 h30; Top Overlay "DB11" at 2853,1101 h30; Top Overlay "DB13" at 2853,1001 h30; Top Overlay "DB15" at 2853,901 h30; Top Overlay "RS" at 2853,801 h30; Top Overlay "E" at 2853,701 h30; Top Overlay "/RST" at 2853,601 h30; Top Overlay "RD" at 2853,501 h30; Top Overlay "CS" at 2853,401 h30; Top Overlay "GND" at 2853,301 h30; Top Overlay "3V3+" at 2529.34,301 h30; Top Overlay "CLE" at 2566.34,401 h30; Top Overlay "WE" at 2582.05,501 h30; Top Overlay "PSB" at 2561.76,601 h30; Top Overlay "R/W" at 2557.91,701 h30; Top Overlay "VO" at 2585.62,801 h30; Top Overlay "DB14" at 2538.34,901 h30; Top Overlay "DB12" at 2539.77,1001 h30; Top Overlay "DB10" at 2539.77,1101 h30; Top Overlay "DB8" at 2561.76,1201 h30; Top Overlay "DB6" at 2563.19,1301 h30; Top Overlay "DB4" at 2560.34,1401 h30; Top Overlay "DB2" at 2561.76,1501 h30; Top Overlay "DB0" at 2561.76,1601 h30; Top Overlay "LEDA" at 2541.63,1701 h30; Top Overlay "SEG12" at 2514.63,1801 h30; Top Overlay "SEG10" at 2514.63,1901 h30; Top Overlay "SEG8" at 2536.63,2001 h30; Top Overlay "SEG6" at 2538.06,2101 h30; Top Overlay "1" at 2683,3481 h30; Top Overlay "2" at 2783,3481 h30; Top Overlay "64" at 2773,221 h30; Top Overlay "63" at 2673,221 h30; Top Overlay "COM0" at 2524.06,2601 h30; Top Overlay "COM2" at 2524.06,2501 h30; Top Overlay "SEG0" at 2536.63,2401 h30; Top Overlay "SEG2" at 2536.63,2301 h30; Top Overlay "SEG4" at 2535.2,2201 h30; Top Overlay "RXD1" at 2539.87,3401 h30; Top Overlay "RXD2" at 2527.02,3301 h30; Top Overlay "RXD3" at 2527.02,3201 h30; Top Overlay "RXD4" at 2525.59,3101 h30; Top Overlay "RXD5" at 2527.02,3001 h30; Top Overlay "GPIO1_INT" at 2432.75,2901 h30; Top Overlay "GPIO3_INT" at 2428.04,2801 h30; Top Overlay "GPIO5" at 2516.02,2701 h30; Top Overlay "GPIO6" at 2853,2701 h30; Top Overlay "GPIO4_INT" at 2853,2801 h30; Top Overlay "GPIO2_INT" at 2853,2901 h30; Top Overlay "TXD5" at 2853,3001 h30; Top Overlay "TXD4" at 2853,3101 h30; Top Overlay "TXD3" at 2853,3201 h30; Top Overlay "TXD2" at 2853,3301 h30; Top Overlay "TXD1" at 2853,3401 h30; Top Overlay "UART" at 3117.94,3147.22 h30 r90; Top Overlay "GPIO" at 3117.94,2777.14 h30 r90; Bottom Overlay "SEG4" at 2627.93,2201 h30; Bottom Overlay "SEG2" at 2627.93,2301 h30; Bottom Overlay "SEG0" at 2627.93,2401 h30; Bottom Overlay "COM2" at 2627.93,2501 h30; Bottom Overlay "COM0" at 2627.93,2601 h30; Bottom Overlay "SEG6" at 2627.93,2101 h30; Bottom Overlay "SEG8" at 2627.93,2001 h30; Bottom Overlay "SEG10" at 2627.93,1901 h30; Bottom Overlay "SEG12" at 2627.93,1801 h30; Bottom Overlay "LEDA" at 2627.93,1701 h30; Bottom Overlay "DB0" at 2627.93,1601 h30; Bottom Overlay "DB2" at 2627.93,1501 h30; Bottom Overlay "DB4" at 2627.93,1401 h30; Bottom Overlay "DB6" at 2627.93,1301 h30; Bottom Overlay "DB8" at 2627.93,1201 h30; Bottom Overlay "DB10" at 2627.93,1101 h30; Bottom Overlay "DB12" at 2627.93,1001 h30; Bottom Overlay "DB14" at 2627.93,901 h30; Bottom Overlay "VO" at 2627.93,801 h30; Bottom Overlay "R/W" at 2627.93,701 h30; Bottom Overlay "PSB" at 2627.93,601 h30; Bottom Overlay "WE" at 2627.93,501 h30; Bottom Overlay "CLE" at 2627.93,401 h30; Bottom Overlay "3V3+" at 2627.93,301 h30; Bottom Overlay "GND" at 2932.45,301 h30; Bottom Overlay "CS" at 2905.74,401 h30; Bottom Overlay "RD" at 2902.6,501 h30; Bottom Overlay "/RST" at 2951.3,601 h30; Bottom Overlay "E" at 2874.46,701 h30; Bottom Overlay "RS" at 2902.6,801 h30; Bottom Overlay "DB15" at 2951.3,901 h30; Bottom Overlay "DB13" at 2951.3,1001 h30; Bottom Overlay "DB11" at 2938.45,1101 h30; Bottom Overlay "DB9" at 2927.88,1201 h30; Bottom Overlay "DB7" at 2929.31,1301 h30; Bottom Overlay "DB5" at 2929.31,1401 h30; Bottom Overlay "DB3" at 2929.31,1501 h30; Bottom Overlay "DB1" at 2916.45,1601 h30; Bottom Overlay "LEDK" at 2946.59,1701 h30; Bottom Overlay "SEG13" at 2976.44,1801 h30; Bottom Overlay "SEG11" at 2963.59,1901 h30; Bottom Overlay "SEG9" at 2953.02,2001 h30; Bottom Overlay "SEG7" at 2954.45,2101 h30; Bottom Overlay "COM1" at 2954.16,2601 h30; Bottom Overlay "COM3" at 2967.01,2501 h30; Bottom Overlay "SEG1" at 2941.59,2401 h30; Bottom Overlay "SEG3" at 2954.45,2301 h30; Bottom Overlay "SEG5" at 2954.45,2201 h30; Bottom Overlay "Power" at 3117,330.92 h30 r90; Bottom Overlay "LCD_8080" at 3117.94,580.29 h30 r90; Bottom Overlay "LCD_DOT" at 3117,801 h30 r90; Bottom Overlay "DataBus DOT/8080" at 3117.94,1457.46 h30 r90; Bottom Overlay "Backlight" at 3117,1801 h30 r90; Bottom Overlay "LCD_Seg" at 3117,2221 h30 r90; Bottom Overlay "GPIO5" at 2629.96,2701 h30; Bottom Overlay "GPIO3_INT" at 2629.96,2801 h30; Bottom Overlay "GPIO1_INT" at 2629.96,2901 h30; Bottom Overlay "RXD5" at 2629.96,3001 h30; Bottom Overlay "RXD4" at 2629.96,3101 h30; Bottom Overlay "RXD3" at 2629.96,3201 h30; Bottom Overlay "RXD2" at 2629.96,3301 h30; Bottom Overlay "RXD1" at 2629.96,3401 h30; Bottom Overlay "UART" at 3114.01,3245.65 h30 r90; Bottom Overlay "GPIO" at 3117.94,2859.82 h30 r90; Bottom Overlay "TXD1" at 2936.03,3401 h30; Bottom Overlay "TXD2" at 2948.88,3301 h30; Bottom Overlay "TXD3" at 2948.88,3201 h30; Bottom Overlay "TXD4" at 2950.31,3101 h30; Bottom Overlay "TXD5" at 2948.88,3001 h30; Bottom Overlay "GPIO2_INT" at 3051,2901 h30; Bottom Overlay "GPIO4_INT" at 3051,2801 h30; Bottom Overlay "GPIO6" at 2961.6,2701 h30